# Altium PCB I2C_module_v1.PcbDoc (part 3 of 4)
Units mil, origin at the board's own origin, x right, y up, seen from the top; angles counter-clockwise.
Board outline 3300 x 2890 mil, 2 copper layers (Top Layer, Bottom Layer); 41 components, 28 nets, 177 pads, 28 vias.
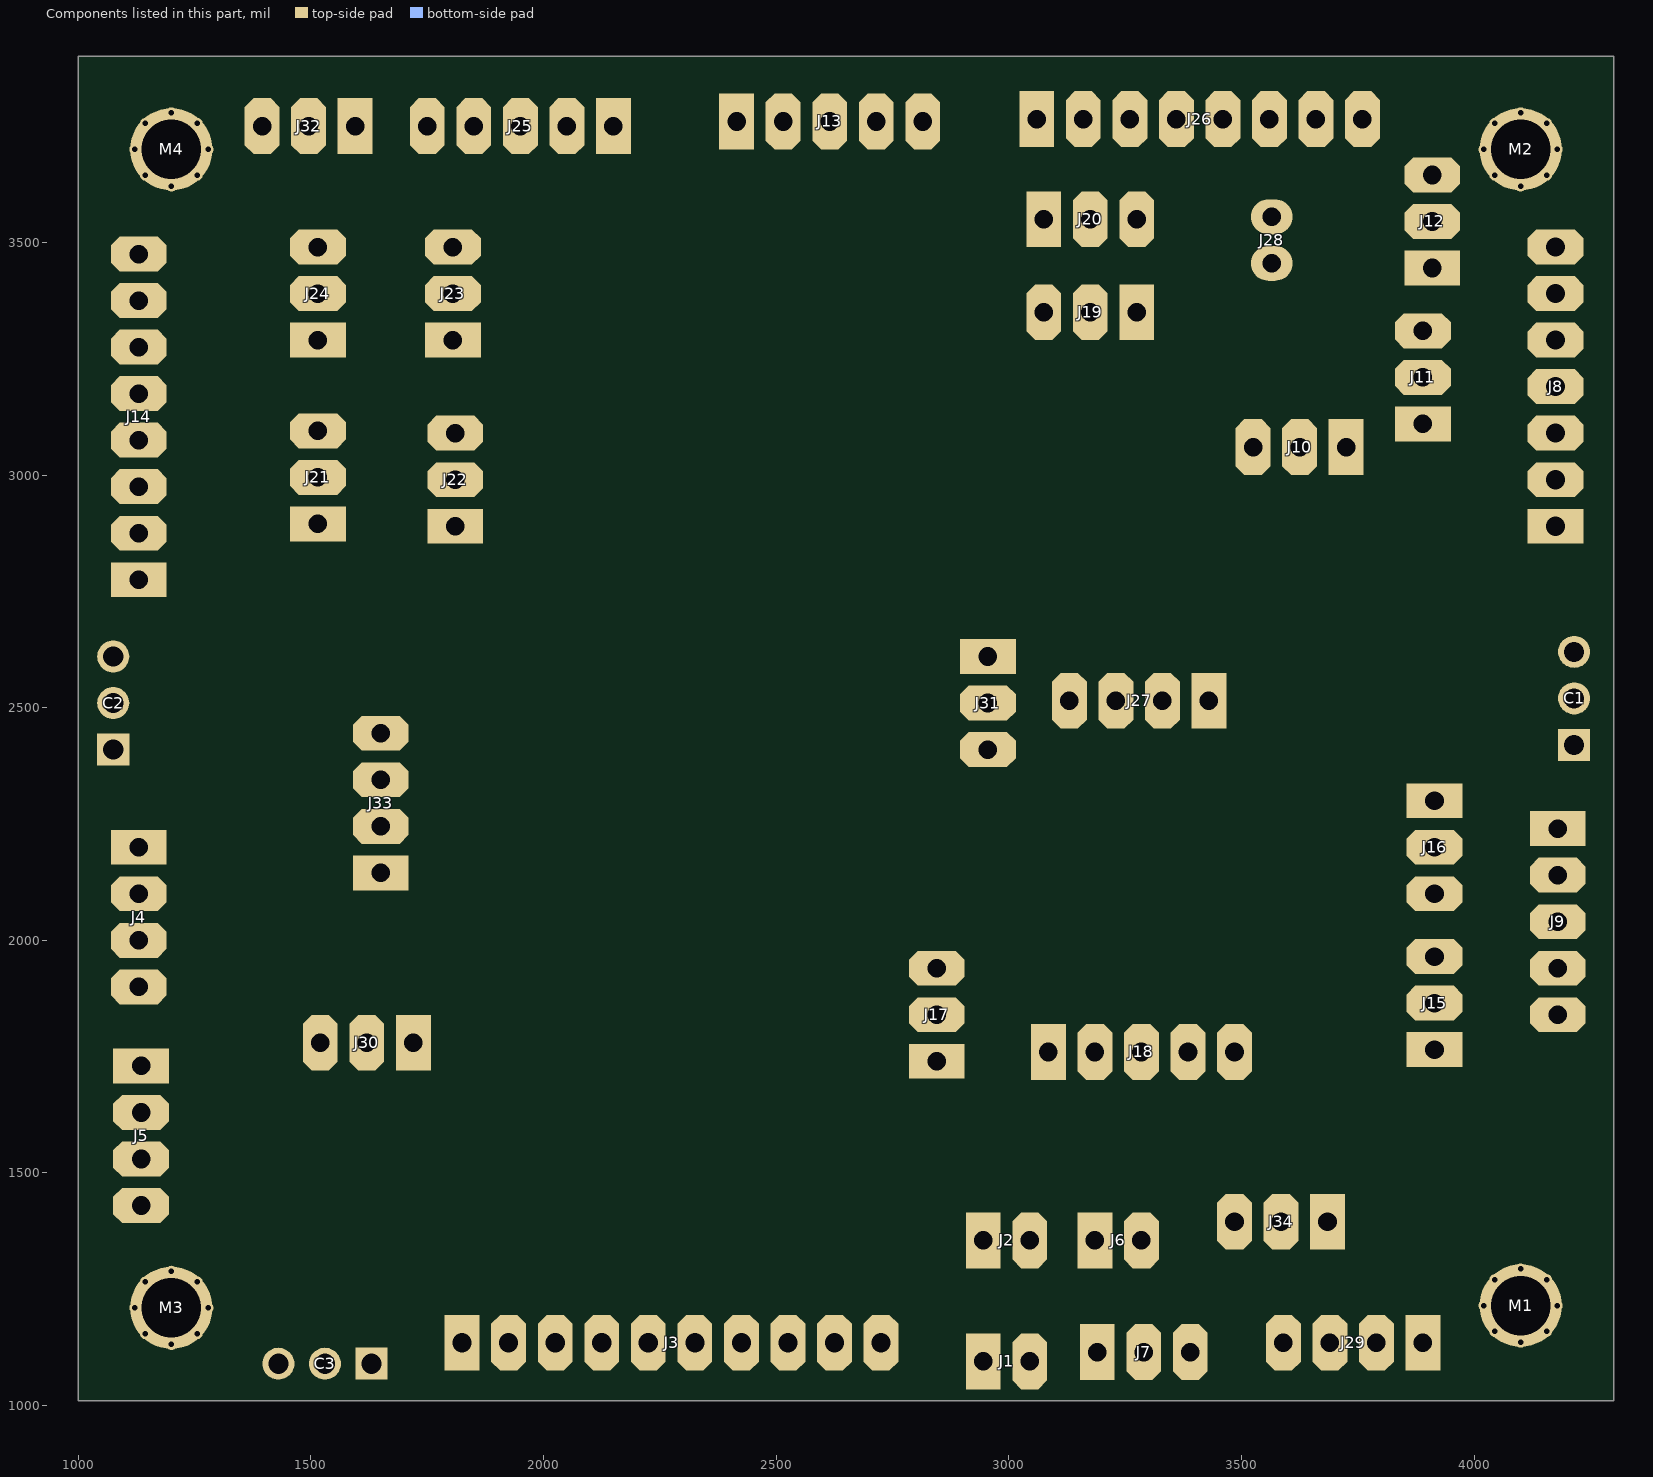
[diagram p3: the components of this part, seen from the top]

## Via types
v1: diameter 50, hole 28, Top Layer to Bottom Layer, 28 vias

## Nets (pads, with @x,y where several pads share a name; then routed paths per layer and width w, separated by ;. In a path a pad name is that pad's centre, name@x,y a point inside that pad or via, vN(x,y) a via of type N, cw(c..) or ccw(c..) an arc to the next point about the centre after c; other vN are vias at no path point) (continued)
copper on no net: (continued)
  Top Layer w0.3: 1963.5,2169.8 1967.1,2169.8 ; 1963.5,2177.6 1967.1,2177.6 ; 1963.5,2190.5 1967.4,2190.5 ; 1963.5,2198.3 1967.1,2198.3 ; 1963.5,2419.1 1968.3,2419.1 ; 1963.8,2159.3 1966.8,2159.3 ; 1963.8,2167.4 1966.8,2167.4 ; 1963.8,2180 1966.8,2180 ; 1963.8,2188.1 1966.8,2188.1 ; 1963.8,2311.4 2011.8,2311.4 ; 1963.8,2419.4 1968.6,2419.4 ; 1963.8,2419.7 1968.6,2419.7 ; 1964.1,2157.2 1966.5,2157.2 ; 1964.1,2190.2 1966.5,2190.2 ; 1964.1,2282.6 2036.7,2282.6 ; 1964.1,2420 1968.9,2420 ; 1964.4,2169.5 1966.2,2169.5 ; 1964.4,2177.9 1966.2,2177.9 ; 1964.4,2198.6 1966.2,2198.6 ; 1964.4,2420.3 1969.2,2420.3 ; 1964.7,2420.6 1969.5,2420.6 ; 1965,2140.7 1969.2,2140.7 ; 1965,2311.7 2012.4,2311.7 ; 1965,2420.9 1969.8,2420.9 ; 1965,2421.2 1970.1,2421.2 ; 1965.3,2421.5 1970.4,2421.5 ; 1965.6,2421.8 1970.7,2421.8 ; 1965.9,2422.1 1971,2422.1 ; 1966.2,2140.4 1969.2,2140.4 ; 1966.2,2312 2013.3,2312 ; 1966.2,2422.4 1971.3,2422.4 ; 1966.2,2422.7 1971.6,2422.7 ; 1966.5,2129 1968,2129 ; 1966.5,2140.1 1969.2,2140.1 ; 1966.5,2423 1971.9,2423 ; 1966.8,2423.3 1972.2,2423.3 ; 1967.1,2129.3 1968.3,2129.3 ; 1967.1,2139.8 1969.2,2139.8 ; 1967.1,2312.3 2013.9,2312.3 ; 1967.1,2423.6 1972.5,2423.6 ; 1967.4,2129.6 1968.6,2129.6 ; 1967.4,2139.5 1969.2,2139.5 ; 1967.4,2282.9 2038.2,2282.9 ; 1967.4,2423.9 1972.8,2423.9 ; 1967.7,2129.9 1968.9,2129.9 ; 1967.7,2138.9 1969.2,2138.9 ; 1967.7,2139.2 1969.2,2139.2 ; 1967.7,2424.2 1973.1,2424.2 ; 1967.7,2424.5 1973.4,2424.5 ; 1968,2130.2 1969.2,2130.2 ; 1968,2138.6 1969.2,2138.6 ; 1968,2141 1969.2,2141 ; 1968,2424.8 1973.7,2424.8 ; 1968.3,2130.5 1969.5,2130.5 ; 1968.3,2138 1969.2,2138 ; 1968.3,2138.3 1969.2,2138.3 ; 1968.3,2141.3 1969.2,2141.3 ; 1968.3,2141.6 1968.9,2141.6 ; 1968.3,2312.6 2014.5,2312.6 ; 1968.3,2425.1 1974,2425.1 ; 1968.6,2130.8 1969.5,2130.8 ; 1968.6,2137.1 1969.2,2137.1 ; 1968.6,2137.4 1969.2,2137.4 ; 1968.6,2137.7 1969.2,2137.7 ; 1968.6,2425.4 1974.3,2425.4 ; 1968.9,2131.1 1969.5,2131.1 ; 1968.9,2131.4 1969.2,2131.4 ; 1968.9,2425.7 1974.6,2425.7 ; 1969.2,2312.9 2015.1,2312.9 ; 1969.2,2426 1974.9,2426 ; 1969.5,2426.3 1975.2,2426.3 ; 1969.5,2426.6 1975.5,2426.6 ; 1969.8,2426.9 1975.8,2426.9 ; 1970.1,2313.2 2015.7,2313.2 ; 1970.1,2427.2 1976.1,2427.2 ; 1970.4,2283.2 2039.7,2283.2 ; 1970.4,2427.5 1976.4,2427.5 ; 1970.7,2427.8 1976.7,2427.8 ; 1971,2428.1 1977.3,2428.1 ; 1971.3,2172.8 1979.7,2172.8 ; 1971.3,2173.1 1980,2173.1 ; 1971.3,2173.4 1980,2173.4 ; 1971.3,2173.7 1980,2173.7 ; 1971.3,2174 1980,2174 ; 1971.3,2174.3 1980,2174.3 ; 1971.3,2174.6 1979.7,2174.6 ; 1971.3,2193.5 1979.7,2193.5 ; 1971.3,2193.8 1980,2193.8 ; 1971.3,2194.1 1980,2194.1 ; 1971.3,2194.4 1980,2194.4 ; 1971.3,2194.7 1980,2194.7 ; 1971.3,2195 1980,2195 ; 1971.3,2195.3 1979.7,2195.3 ; 1971.3,2313.5 2016.3,2313.5 ; 1971.3,2428.4 1977.6,2428.4 ; 1971.6,2171.9 1979.7,2171.9 ; 1971.6,2172.2 1979.7,2172.2 ; 1971.6,2172.5 1979.7,2172.5 ; 1971.6,2174.9 1979.7,2174.9 ; 1971.6,2175.2 1979.7,2175.2 ; 1971.6,2175.5 1979.7,2175.5 ; 1971.6,2192.6 1979.7,2192.6 ; 1971.6,2192.9 1979.7,2192.9 ; 1971.6,2193.2 1979.7,2193.2 ; 1971.6,2195.6 1979.7,2195.6 ; 1971.6,2195.9 1979.7,2195.9 ; 1971.6,2196.2 1979.7,2196.2 ; 1971.6,2428.7 1977.9,2428.7 ; 1971.9,2171.3 1979.1,2171.3 ; 1971.9,2171.6 1979.4,2171.6 ; 1971.9,2175.8 1979.4,2175.8 ; 1971.9,2176.1 1979.1,2176.1 ; 1971.9,2192 1979.4,2192 ; 1971.9,2192.3 1979.4,2192.3 ; 1971.9,2196.5 1979.4,2196.5 ; 1971.9,2196.8 1979.1,2196.8 ; 1971.9,2429 1978.2,2429 ; 1971.9,2429.3 1978.5,2429.3 ; 1972.2,2171 1979.1,2171 ; 1972.2,2176.4 1979.1,2176.4 ; 1972.2,2191.7 1979.1,2191.7 ; 1972.2,2197.1 1979.1,2197.1 ; 1972.2,2313.8 2016.9,2313.8 ; 1972.2,2429.6 1978.8,2429.6 ; 1972.5,2170.7 1978.8,2170.7 ; 1972.5,2176.7 1978.8,2176.7 ; 1972.5,2191.4 1978.8,2191.4 ; 1972.5,2197.4 1978.8,2197.4 ; 1972.5,2429.9 1979.1,2429.9 ; 1972.8,2170.4 1978.5,2170.4 ; 1972.8,2177 1978.5,2177 ; 1972.8,2191.1 1978.5,2191.1 ; 1972.8,2197.7 1978.5,2197.7 ; 1972.8,2430.2 1979.7,2430.2 ; 1973.1,2170.1 1978.2,2170.1 ; 1973.1,2177.3 1978.2,2177.3 ; 1973.1,2190.8 1978.2,2190.8 ; 1973.1,2198 1977.9,2198 ; 1973.1,2283.5 2040.9,2283.5 ; 1973.1,2314.1 2017.5,2314.1 ; 1973.1,2430.5 1980,2430.5 ; 1973.4,2430.8 1980.3,2430.8 ; 1973.7,2169.8 1977.6,2169.8 ; 1973.7,2177.6 1977.6,2177.6 ; 1973.7,2190.5 1977.6,2190.5 ; 1973.7,2198.3 1977.6,2198.3 ; 1973.7,2431.1 1980.6,2431.1 ; 1974,2314.4 2018.1,2314.4 ; 1974,2431.4 1980.9,2431.4 ; 1974.3,2431.7 1981.5,2431.7 ; 1974.6,2169.5 1976.7,2169.5 ; 1974.6,2177.9 1976.7,2177.9 ; 1974.6,2190.2 1976.7,2190.2 ; 1974.6,2198.6 1976.4,2198.6 ; 1974.6,2432 1981.8,2432 ; 1974.9,2314.7 2018.4,2314.7 ; 1974.9,2432.3 1982.1,2432.3 ; 1975.2,2432.6 1982.4,2432.6 ; 1975.5,2283.8 2042.4,2283.8 ; 1975.5,2432.9 1983,2432.9 ; 1975.8,2315 2019,2315 ; 1975.8,2433.2 1983.3,2433.2 ; 1976.1,2433.5 1983.6,2433.5 ; 1976.4,2433.8 1983.9,2433.8 ; 1976.7,2315.3 2019.6,2315.3 ; 1976.7,2434.1 1984.5,2434.1 ; 1977,2434.4 1984.8,2434.4 ; 1977.3,2434.7 1985.1,2434.7 ; 1977.6,2315.6 2020.2,2315.6 ; 1977.6,2435 1985.7,2435 ; 1977.9,2284.1 2043.6,2284.1 ; 1977.9,2435.3 1986,2435.3 ; 1978.2,2435.6 1986.3,2435.6 ; 1978.5,2315.9 2020.5,2315.9 ; 1978.5,2435.9 1986.9,2435.9 ; 1978.8,2138.3 1979.4,2138.3 ; 1978.8,2138.6 1979.4,2138.6 ; 1978.8,2138.9 1979.4,2138.9 ; 1978.8,2139.2 1979.7,2139.2 ; 1978.8,2139.5 1979.7,2139.5 ; 1978.8,2139.8 1980,2139.8 ; 1978.8,2140.1 1980.6,2140.1 ; 1978.8,2140.4 1989.9,2140.4 ; 1978.8,2140.7 1989.9,2140.7 ; 1978.8,2141 1989.9,2141 ; 1978.8,2141.3 1989.9,2141.3 ; 1978.8,2436.2 1987.2,2436.2 ; 1979.1,2316.2 2021.1,2316.2 ; 1979.1,2436.5 1987.5,2436.5 ; 1979.4,2436.8 1988.1,2436.8 ; 1979.7,2437.1 1988.4,2437.1 ; 1980,2316.5 2021.7,2316.5 ; 1980,2437.4 1989,2437.4 ; 1980.3,2284.4 2044.8,2284.4 ; 1980.3,2437.7 1989.3,2437.7 ; 1980.6,2438 1989.9,2438 ; 1980.9,2316.8 2022,2316.8 ; 1981.2,2438.3 1990.2,2438.3 ; 1981.5,2173.4 1990.2,2173.4 ; 1981.5,2173.7 1990.2,2173.7 ; 1981.5,2174 1990.2,2174 ; 1981.5,2193.8 1990.2,2193.8 ; 1981.5,2194.1 1990.2,2194.1 ; 1981.5,2194.4 1990.2,2194.4 ; 1981.5,2194.7 1990.2,2194.7 ; 1981.5,2317.1 2022.6,2317.1 ; 1981.5,2438.6 1990.5,2438.6 ; 1981.8,2172.2 1989.9,2172.2 ; 1981.8,2172.5 1989.9,2172.5 ; 1981.8,2172.8 1990.2,2172.8 ; 1981.8,2173.1 1990.2,2173.1 ; 1981.8,2174.3 1990.2,2174.3 ; 1981.8,2174.6 1990.2,2174.6 ; 1981.8,2174.9 1989.9,2174.9 ; 1981.8,2175.2 1989.9,2175.2 ; 1981.8,2192.9 1989.9,2192.9 ; 1981.8,2193.2 1989.9,2193.2 ; 1981.8,2193.5 1990.2,2193.5 ; 1981.8,2195 1990.2,2195 ; 1981.8,2195.3 1990.2,2195.3 ; 1981.8,2195.6 1989.9,2195.6 ; 1981.8,2195.9 1989.9,2195.9 ; 1981.8,2438.9 1991.1,2438.9 ; 1982.1,2171.6 1989.6,2171.6 ; 1982.1,2171.9 1989.9,2171.9 ; 1982.1,2175.5 1989.9,2175.5 ; 1982.1,2175.8 1989.6,2175.8 ; 1982.1,2192.3 1989.6,2192.3 ; 1982.1,2192.6 1989.9,2192.6 ; 1982.1,2196.2 1989.9,2196.2 ; 1982.1,2196.5 1989.6,2196.5 ; 1982.1,2439.2 1991.4,2439.2 ; 1982.4,2171 1989.3,2171 ; 1982.4,2171.3 1989.6,2171.3 ; 1982.4,2176.1 1989.6,2176.1 ; 1982.4,2176.4 1989.3,2176.4 ; 1982.4,2191.7 1989.3,2191.7 ; 1982.4,2192 1989.6,2192 ; 1982.4,2196.8 1989.6,2196.8 ; 1982.4,2197.1 1989.3,2197.1 ; 1982.4,2284.7 2046,2284.7 ; 1982.4,2317.4 2023.2,2317.4 ; 1982.4,2439.5 1992,2439.5 ; 1982.7,2170.7 1989,2170.7 ; 1982.7,2176.7 1989,2176.7 ; 1982.7,2191.4 1989,2191.4 ; 1982.7,2197.4 1989,2197.4 ; 1982.7,2439.8 1992.3,2439.8 ; 1983,2129 1985.4,2129 ; 1983,2129.3 1985.4,2129.3 ; 1983,2129.6 1985.4,2129.6 ; 1983,2170.4 1988.7,2170.4 ; 1983,2177 1988.7,2177 ; 1983,2191.1 1988.7,2191.1 ; 1983,2197.7 1988.7,2197.7 ; 1983,2317.7 2023.5,2317.7 ; 1983,2440.1 1992.9,2440.1 ; 1983.3,2129.9 1985.4,2129.9 ; 1983.3,2130.2 1985.4,2130.2 ; 1983.3,2130.5 1985.4,2130.5 ; 1983.3,2130.8 1985.4,2130.8 ; 1983.3,2131.1 1985.4,2131.1 ; 1983.3,2131.4 1985.4,2131.4 ; 1983.3,2131.7 1985.4,2131.7 ; 1983.3,2132 1985.4,2132 ; 1983.3,2132.3 1985.4,2132.3 ; 1983.3,2132.6 1985.4,2132.6 ; 1983.3,2132.9 1985.4,2132.9 ; 1983.3,2133.2 1985.4,2133.2 ; 1983.3,2133.5 1985.4,2133.5 ; 1983.3,2133.8 1985.4,2133.8 ; 1983.3,2134.1 1985.4,2134.1 ; 1983.3,2134.4 1985.4,2134.4 ; 1983.3,2134.7 1985.4,2134.7 ; 1983.3,2135 1985.4,2135 ; 1983.3,2135.3 1985.4,2135.3 ; 1983.3,2135.6 1985.4,2135.6 ; 1983.3,2135.9 1985.4,2135.9 ; 1983.3,2136.2 1985.4,2136.2 ; 1983.3,2136.5 1985.4,2136.5 ; 1983.3,2136.8 1985.4,2136.8 ; 1983.3,2137.1 1985.4,2137.1 ; 1983.3,2137.4 1985.4,2137.4 ; 1983.3,2137.7 1985.4,2137.7 ; 1983.3,2138 1985.4,2138 ; 1983.3,2138.3 1985.4,2138.3 ; 1983.3,2138.6 1985.4,2138.6 ; 1983.3,2138.9 1985.4,2138.9 ; 1983.3,2139.2 1985.4,2139.2 ; 1983.3,2139.5 1985.4,2139.5 ; 1983.3,2139.8 1985.4,2139.8 ; 1983.3,2140.1 1985.4,2140.1 ; 1983.3,2190.8 1988.4,2190.8 ; 1983.3,2440.4 1993.5,2440.4 ; 1983.6,2170.1 1988.4,2170.1 ; 1983.6,2177.3 1988.4,2177.3 ; 1983.6,2198 1988.4,2198 ; 1983.9,2169.8 1987.8,2169.8 ; 1983.9,2177.6 1987.8,2177.6 ; 1983.9,2190.5 1987.8,2190.5 ; 1983.9,2198.3 1987.8,2198.3 ; 1983.9,2318 2024.1,2318 ; 1983.9,2440.7 1993.8,2440.7 ; 1984.2,2285 2047.2,2285 ; 1984.2,2441 1994.4,2441 ; 1984.5,2318.3 2024.4,2318.3 ; 1984.5,2357.3 1989.6,2357.3 ; 1984.5,2441.3 1994.7,2441.3 ; 1984.8,2169.5 1986.9,2169.5 ; 1984.8,2177.9 1986.9,2177.9 ; 1984.8,2190.2 1986.9,2190.2 ; 1984.8,2357 1992.6,2357 ; 1984.8,2441.6 1995.3,2441.6 ; 1985.1,2198.6 1986.9,2198.6 ; 1985.1,2318.6 2024.7,2318.6 ; 1985.1,2441.9 1995.9,2441.9 ; 1985.4,2356.7 1994.7,2356.7 ; 1985.4,2442.2 1996.2,2442.2 ; 1986,2318.9 2025.3,2318.9 ; 1986,2356.4 1996.5,2356.4 ; 1986,2442.5 1996.8,2442.5 ; 1986.3,2285.3 2048.4,2285.3 ; 1986.3,2442.8 1997.4,2442.8 ; 1986.6,2319.2 2025.6,2319.2 ; 1986.6,2443.1 1997.7,2443.1 ; 1986.9,2356.1 1998.3,2356.1 ; 1986.9,2443.4 1998.3,2443.4 ; 1987.2,2319.5 2025.9,2319.5 ; 1987.5,2355.8 1999.8,2355.8 ; 1987.5,2443.7 1998.9,2443.7 ; 1987.8,2319.8 2026.5,2319.8 ; 1987.8,2444 1999.5,2444 ; 1988.1,2140.1 1989.9,2140.1 ; 1988.1,2285.6 2049.6,2285.6 ; 1988.1,2355.5 2001.3,2355.5 ; 1988.1,2444.3 1999.8,2444.3 ; 1988.4,2139.8 1989.9,2139.8 ; 1988.4,2320.1 2026.8,2320.1 ; 1988.4,2444.6 2000.4,2444.6 ; 1988.7,2139.5 1989.9,2139.5 ; 1989,2138.9 1989.9,2138.9 ; 1989,2139.2 1989.9,2139.2 ; 1989,2320.4 2027.1,2320.4 ; 1989,2355.2 2002.5,2355.2 ; 1989,2444.9 2001,2444.9 ; 1989.3,2138.3 1989.9,2138.3 ; 1989.3,2138.6 1989.9,2138.6 ; 1989.3,2445.2 2001.6,2445.2 ; 1989.6,2320.7 2027.7,2320.7 ; 1989.6,2354.9 2004,2354.9 ; 1989.6,2445.5 2002.2,2445.5 ; 1989.9,2285.9 2050.8,2285.9 ; 1990.2,2321 2028,2321 ; 1990.2,2354.6 2005.2,2354.6 ; 1990.2,2445.8 2002.8,2445.8 ; 1990.5,2446.1 2003.4,2446.1 ; 1990.8,2321.3 2028.3,2321.3 ; 1990.8,2354.3 2006.1,2354.3 ; 1990.8,2446.4 2004,2446.4 ; 1991.1,2446.7 2004.6,2446.7 ; 1991.4,2321.6 2028.6,2321.6 ; 1991.4,2354 2007.3,2354 ; 1991.7,2286.2 2052,2286.2 ; 1991.7,2447 2005.2,2447 ; 1992,2169.5 2013.6,2169.5 ; 1992,2169.8 2013.3,2169.8 ; 1992,2170.1 2013,2170.1 ; 1992,2170.4 2012.7,2170.4 ; 1992,2170.7 2012.4,2170.7 ; 1992,2171 2012.1,2171 ; 1992,2171.3 2011.8,2171.3 ; 1992,2171.6 2011.2,2171.6 ; 1992,2171.9 2010.9,2171.9 ; 1992,2172.2 2010.6,2172.2 ; 1992,2172.5 2010,2172.5 ; 1992,2172.8 2010.3,2172.8 ; 1992,2173.1 2010.9,2173.1 ; 1992,2173.4 2011.8,2173.4 ; 1992,2173.7 2012.4,2173.7 ; 1992,2174 2013,2174 ; 1992,2174.3 2013.6,2174.3 ; 1992,2174.6 2013.9,2174.6 ; 1992,2174.9 2014.5,2174.9 ; 1992,2175.2 2015.1,2175.2 ; 1992,2175.5 2015.4,2175.5 ; 1992,2175.8 2015.7,2175.8 ; 1992,2176.1 2016.3,2176.1 ; 1992,2176.4 2016.6,2176.4 ; 1992,2176.7 2016.9,2176.7 ; 1992,2177 2017.5,2177 ; 1992,2177.3 2017.8,2177.3 ; 1992,2177.6 2018.1,2177.6 ; 1992,2177.9 2018.4,2177.9 ; 1992,2190.2 2018.1,2190.2 ; 1992,2190.5 2017.8,2190.5 ; 1992,2190.8 2017.5,2190.8 ; 1992,2191.1 2017.2,2191.1 ; 1992,2191.4 2016.9,2191.4 ; 1992,2191.7 2016.6,2191.7 ; 1992,2192 2016,2192 ; 1992,2192.3 2015.7,2192.3 ; 1992,2192.6 2015.4,2192.6 ; 1992,2192.9 2014.8,2192.9 ; 1992,2193.2 2014.2,2193.2 ; 1992,2193.5 2013.9,2193.5 ; 1992,2193.8 2013.3,2193.8 ; 1992,2194.1 2012.7,2194.1 ; 1992,2194.4 2012.1,2194.4 ; 1992,2194.7 2011.5,2194.7 ; 1992,2195 2010.9,2195 ; 1992,2195.3 2010,2195.3 ; 1992,2195.6 2009.4,2195.6 ; 1992,2195.9 2008.5,2195.9 ; 1992,2196.2 2007.6,2196.2 ; 1992,2196.5 2006.7,2196.5 ; 1992,2196.8 2005.5,2196.8 ; 1992,2197.1 2004.3,2197.1 ; 1992,2197.4 2003.1,2197.4 ; 1992,2197.7 2001.6,2197.7 ; 1992,2198 1999.8,2198 ; 1992,2198.3 1997.7,2198.3 ; 1992,2198.6 1993.8,2198.6 ; 1992,2321.9 2028.9,2321.9 ; 1992,2447.3 2005.8,2447.3 ; 1992.3,2353.7 2008.5,2353.7 ; 1992.6,2322.2 2029.2,2322.2 ; 1992.6,2447.6 2006.4,2447.6 ; 1992.9,2353.4 2009.4,2353.4 ; 1992.9,2447.9 2007,2447.9 ; 1993.2,2286.5 2052.9,2286.5 ; 1993.2,2322.5 2029.5,2322.5 ; 1993.2,2448.2 2007.6,2448.2 ; 1993.5,2322.8 2029.8,2322.8 ; 1993.5,2353.1 2010.6,2353.1 ; 1993.8,2448.5 2008.2,2448.5 ; 1994.1,2323.1 2030.1,2323.1 ; 1994.1,2352.8 2011.5,2352.8 ; 1994.1,2448.8 2008.8,2448.8 ; 1994.4,2169.2 2013.9,2169.2 ; 1994.7,2323.4 2030.4,2323.4 ; 1994.7,2352.5 2012.4,2352.5 ; 1994.7,2449.1 2009.7,2449.1 ; 1995,2286.8 2054.1,2286.8 ; 1995,2323.7 2030.7,2323.7 ; 1995,2449.4 2010.3,2449.4 ; 1995.3,2352.2 2013.3,2352.2 ; 1995.3,2449.7 2010.9,2449.7 ; 1995.6,2324 2031,2324 ; 1995.9,2351.9 2014.2,2351.9 ; 1995.9,2450 2011.5,2450 ; 1996.2,2189.9 2018.4,2189.9 ; 1996.2,2324.3 2031.3,2324.3 ; 1996.2,2450.3 2012.4,2450.3 ; 1996.5,2168.9 2014.2,2168.9 ; 1996.5,2178.2 2018.7,2178.2 ; 1996.5,2287.1 2055,2287.1 ; 1996.5,2324.6 2031.6,2324.6 ; 1996.5,2351.6 2015.1,2351.6 ; 1996.8,2450.6 2013,2450.6 ; 1997.1,2324.9 2031.9,2324.9 ; 1997.1,2351.3 2016,2351.3 ; 1997.1,2450.9 2013.9,2450.9 ; 1997.4,2325.2 2032.2,2325.2 ; 1997.7,2168.6 2014.5,2168.6 ; 1997.7,2351 2016.9,2351 ; 1997.7,2451.2 2014.5,2451.2 ; 1998,2287.4 2055.9,2287.4 ; 1998,2325.5 2032.5,2325.5 ; 1998.3,2325.8 2032.8,2325.8 ; 1998.3,2350.7 2017.5,2350.7 ; 1998.3,2451.5 2015.4,2451.5 ; 1998.6,2141 2007,2141 ; 1998.6,2141.3 2005.8,2141.3 ; 1998.6,2451.8 2016,2451.8 ; 1998.9,2168.3 2014.8,2168.3 ; 1998.9,2326.1 2032.8,2326.1 ; 1998.9,2350.4 2018.4,2350.4 ; 1999.2,2189.6 2018.7,2189.6 ; 1999.2,2326.4 2033.1,2326.4 ; 1999.2,2350.1 2019,2350.1 ; 1999.2,2452.1 2016.9,2452.1 ; 1999.5,2140.7 2007.6,2140.7 ; 1999.5,2287.7 2057.1,2287.7 ; 1999.5,2326.7 2033.4,2326.7 ; 1999.5,2452.4 2017.5,2452.4 ; 1999.8,2168 2015.1,2168 ; 1999.8,2178.5 2018.7,2178.5 ; 1999.8,2349.8 2019.9,2349.8 ; 2000.1,2129 2002.8,2129 ; 2000.1,2140.4 2007.9,2140.4 ; 2000.1,2327 2033.7,2327 ; 2000.1,2452.7 2018.4,2452.7 ; 2000.4,2129.3 2002.8,2129.3 ; 2000.4,2129.6 2002.5,2129.6 ; 2000.4,2129.9 2002.5,2129.9 ; 2000.4,2130.2 2002.5,2130.2 ; 2000.4,2130.5 2002.5,2130.5 ; 2000.4,2130.8 2002.5,2130.8 ; 2000.4,2131.1 2002.5,2131.1 ; 2000.4,2131.4 2002.5,2131.4 ; 2000.4,2131.7 2002.5,2131.7 ; 2000.4,2132 2002.5,2132 ; 2000.4,2132.3 2002.5,2132.3 ; 2000.4,2132.6 2002.5,2132.6 ; 2000.4,2132.9 2002.5,2132.9 ; 2000.4,2133.2 2002.5,2133.2 ; 2000.4,2133.5 2002.5,2133.5 ; 2000.4,2133.8 2002.5,2133.8 ; 2000.4,2134.1 2006.1,2134.1 ; 2000.4,2134.4 2006.4,2134.4 ; 2000.4,2134.7 2007,2134.7 ; 2000.4,2135 2002.5,2135 ; 2000.4,2135.3 2002.5,2135.3 ; 2000.4,2135.6 2002.5,2135.6 ; 2000.4,2135.9 2002.5,2135.9 ; 2000.4,2136.2 2002.5,2136.2 ; 2000.4,2136.5 2002.5,2136.5 ; 2000.4,2136.8 2002.5,2136.8 ; 2000.4,2137.1 2002.5,2137.1 ; 2000.4,2137.4 2002.5,2137.4 ; 2000.4,2137.7 2002.5,2137.7 ; 2000.4,2138 2002.5,2138 ; 2000.4,2138.3 2002.5,2138.3 ; 2000.4,2138.6 2002.5,2138.6 ; 2000.4,2138.9 2002.5,2138.9 ; 2000.4,2139.2 2002.5,2139.2 ; 2000.4,2139.5 2002.5,2139.5 ; 2000.4,2139.8 2002.5,2139.8 ; 2000.4,2140.1 2002.5,2140.1 ; 2000.4,2167.7 2015.4,2167.7 ; 2000.4,2327.3 2033.7,2327.3 ; 2000.4,2349.5 2020.5,2349.5 ; 2000.4,2453 2019.3,2453 ; 2000.7,2327.6 2034,2327.6 ; 2000.7,2349.2 2021.4,2349.2 ; 2001,2288 2058,2288 ; 2001,2327.9 2034.3,2327.9 ; 2001,2453.3 2020.2,2453.3 ; 2001.3,2167.4 2015.7,2167.4 ; 2001.3,2189.3 2019,2189.3 ; 2001.3,2348.9 2022,2348.9 ; 2001.6,2328.2 2034.3,2328.2 ; 2001.6,2348.6 2022.6,2348.6 ; 2001.6,2453.6 2021.1,2453.6 ; 2001.9,2167.1 2016,2167.1 ; 2001.9,2178.8 2019,2178.8 ; 2001.9,2328.5 2034.6,2328.5 ; 2001.9,2453.9 2022,2453.9 ; 2002.2,2288.3 2058.9,2288.3 ; 2002.2,2328.8 2034.6,2328.8 ; 2002.2,2348.3 2023.2,2348.3 ; 2002.5,2166.8 2016,2166.8 ; 2002.5,2329.1 2034.9,2329.1 ; 2002.5,2348 2023.8,2348 ; 2002.5,2454.2 2022.9,2454.2 ; 2002.8,2329.4 2034.9,2329.4 ; 2002.8,2347.7 2024.4,2347.7 ; 2003.1,2166.5 2016.3,2166.5 ; 2003.1,2189 2019.3,2189 ; 2003.1,2329.7 2035.2,2329.7 ; 2003.1,2454.5 2023.8,2454.5 ; 2003.4,2179.1 2019.3,2179.1 ; 2003.4,2330 2035.2,2330 ; 2003.4,2347.4 2025,2347.4 ; 2003.7,2133.8 2006.4,2133.8 ; 2003.7,2135 2007.6,2135 ; 2003.7,2166.2 2016.6,2166.2 ; 2003.7,2288.6 2059.8,2288.6 ; 2003.7,2330.3 2035.2,2330.3 ; 2003.7,2347.1 2025.6,2347.1 ; 2003.7,2454.8 2024.7,2454.8 ; 2004,2133.5 2006.7,2133.5 ; 2004,2165.9 2016.9,2165.9 ; 2004,2330.6 2035.5,2330.6 ; 2004,2346.8 2026.2,2346.8 ; 2004,2455.1 2025.9,2455.1 ; 2004.3,2133.2 2006.7,2133.2 ; 2004.3,2188.7 2019.3,2188.7 ; 2004.3,2330.9 2035.5,2330.9 ; 2004.3,2346.5 2026.8,2346.5 ; 2004.6,2132.6 2007.3,2132.6 ; 2004.6,2132.9 2007,2132.9 ; 2004.6,2165.6 2016.9,2165.6 ; 2004.6,2331.2 2035.5,2331.2 ; 2004.6,2346.2 2027.1,2346.2 ; 2004.6,2455.4 2026.8,2455.4 ; 2004.9,2132.3 2007.6,2132.3 ; 2004.9,2135.3 2008.2,2135.3 ; 2004.9,2179.4 2019.6,2179.4 ; 2004.9,2288.9 2060.7,2288.9 ; 2004.9,2331.5 2035.8,2331.5 ; 2004.9,2345.9 2027.7,2345.9 ; 2005.2,2131.7 2007.9,2131.7 ; 2005.2,2132 2007.6,2132 ; 2005.2,2140.1 2008.2,2140.1 ; 2005.2,2165.3 2017.2,2165.3 ; 2005.2,2331.8 2035.8,2331.8 ; 2005.2,2345.6 2028,2345.6 ; 2005.2,2455.7 2028,2455.7 ; 2005.5,2131.4 2008.2,2131.4 ; 2005.5,2135.6 2008.2,2135.6 ; 2005.5,2139.8 2008.5,2139.8 ; 2005.5,2165 2017.5,2165 ; 2005.5,2188.4 2019.6,2188.4 ; 2005.5,2332.1 2035.8,2332.1 ; 2005.5,2345.3 2028.6,2345.3 ; 2005.8,2131.1 2008.2,2131.1 ; 2005.8,2135.9 2008.5,2135.9 ; 2005.8,2164.7 2017.5,2164.7 ; 2005.8,2179.7 2019.6,2179.7 ; 2005.8,2332.4 2035.8,2332.4 ; 2005.8,2345 2028.9,2345 ; 2005.8,2456 2028.9,2456 ; 2006.1,2130.5 2008.8,2130.5 ; 2006.1,2130.8 2008.5,2130.8 ; 2006.1,2136.2 2008.8,2136.2 ; 2006.1,2139.2 2008.8,2139.2 ; 2006.1,2139.5 2008.8,2139.5 ; 2006.1,2332.7 2035.8,2332.7 ; 2006.1,2333 2036.1,2333 ; 2006.1,2344.7 2029.5,2344.7 ; 2006.1,2456.3 2030.1,2456.3 ; 2006.4,2130.2 2009.1,2130.2 ; 2006.4,2136.5 2008.8,2136.5 ; 2006.4,2136.8 2009.1,2136.8 ; 2006.4,2137.1 2009.1,2137.1 ; 2006.4,2138.6 2009.1,2138.6 ; 2006.4,2138.9 2009.1,2138.9 ; 2006.4,2164.4 2017.8,2164.4 ; 2006.4,2289.2 2061.6,2289.2 ; 2006.4,2333.3 2036.1,2333.3 ; 2006.4,2344.4 2029.8,2344.4 ; 2006.7,2129.6 2009.4,2129.6 ; 2006.7,2129.9 2009.1,2129.9 ; 2006.7,2137.4 2009.1,2137.4 ; 2006.7,2137.7 2009.1,2137.7 ; 2006.7,2138 2009.1,2138 ; 2006.7,2138.3 2009.1,2138.3 ; 2006.7,2164.1 2018.1,2164.1 ; 2006.7,2188.1 2019.9,2188.1 ; 2006.7,2333.6 2036.1,2333.6 ; 2006.7,2333.9 2036.1,2333.9 ; 2006.7,2343.8 2030.7,2343.8 ; 2006.7,2344.1 2030.1,2344.1 ; 2006.7,2456.6 2031.3,2456.6 ; 2007,2129.3 2009.7,2129.3 ; 2007,2163.8 2018.1,2163.8 ; 2007,2180 2019.9,2180 ; 2007,2334.2 2036.1,2334.2 ; 2007,2343.5 2031,2343.5 ; 2007.3,2129 2010.3,2129 ; 2007.3,2163.5 2018.4,2163.5 ; 2007.3,2334.5 2036.1,2334.5 ; 2007.3,2334.8 2036.1,2334.8 ; 2007.3,2342.9 2031.6,2342.9 ; 2007.3,2343.2 2031.3,2343.2 ; 2007.3,2456.9 2032.8,2456.9 ; 2007.6,2163.2 2018.4,2163.2 ; 2007.6,2187.8 2019.9,2187.8 ; 2007.6,2289.5 2062.5,2289.5 ; 2007.6,2335.1 2035.8,2335.1 ; 2007.6,2335.4 2035.8,2335.4 ; 2007.6,2342.3 2032.2,2342.3 ; 2007.6,2342.6 2031.9,2342.6 ; 2007.9,2162.9 2018.7,2162.9 ; 2007.9,2180.3 2020.2,2180.3 ; 2007.9,2335.7 2035.8,2335.7 ; 2007.9,2336 2035.8,2336 ; 2007.9,2336.3 2035.8,2336.3 ; 2007.9,2341.7 2032.8,2341.7 ; 2007.9,2342 2032.5,2342 ; 2007.9,2457.2 2034,2457.2 ; 2008.2,2162.6 2018.7,2162.6 ; 2008.2,2187.5 2020.2,2187.5 ; 2008.2,2336.6 2035.5,2336.6 ; 2008.2,2336.9 2035.5,2336.9 ; 2008.2,2337.2 2035.5,2337.2 ; 2008.2,2340.8 2033.4,2340.8 ; 2008.2,2341.1 2033.1,2341.1 ; 2008.2,2341.4 2032.8,2341.4 ; 2008.5,2162.3 2019,2162.3 ; 2008.5,2180.6 2020.2,2180.6 ; 2008.5,2337.5 2035.2,2337.5 ; 2008.5,2337.8 2035.2,2337.8 ; 2008.5,2338.1 2035.2,2338.1 ; 2008.5,2338.4 2034.9,2338.4 ; 2008.5,2338.7 2034.9,2338.7 ; 2008.5,2339 2034.6,2339 ; 2008.5,2339.3 2034.3,2339.3 ; 2008.5,2339.6 2034.3,2339.6 ; 2008.5,2339.9 2034,2339.9 ; 2008.5,2340.2 2033.7,2340.2 ; 2008.5,2340.5 2033.7,2340.5 ; 2008.5,2457.5 2035.5,2457.5 ; 2008.8,2162 2019,2162 ; 2008.8,2289.8 2063.1,2289.8 ; 2009.1,2161.7 2019.3,2161.7 ; 2009.1,2187.2 2020.2,2187.2 ; 2009.1,2457.8 2037,2457.8 ; 2009.4,2161.4 2019.3,2161.4 ; 2009.4,2180.9 2020.2,2180.9 ; 2009.7,2160.8 2019.6,2160.8 ; 2009.7,2161.1 2019.6,2161.1 ; 2009.7,2181.2 2020.5,2181.2 ; 2009.7,2186.9 2020.5,2186.9 ; 2009.7,2458.1 2038.5,2458.1 ; 2010,2160.5 2019.6,2160.5 ; 2010,2290.1 2064,2290.1 ; 2010.3,2159.9 2019.9,2159.9 ; 2010.3,2160.2 2019.9,2160.2 ; 2010.3,2181.5 2020.5,2181.5 ; 2010.3,2186.6 2020.5,2186.6 ; 2010.3,2458.4 2040.3,2458.4 ; 2010.6,2159.3 2020.2,2159.3 ; 2010.6,2159.6 2019.9,2159.6 ; 2010.6,2186.3 2020.5,2186.3 ; 2010.9,2158.7 2020.2,2158.7 ; 2010.9,2159 2020.2,2159 ; 2010.9,2181.8 2020.8,2181.8 ; 2010.9,2458.7 2042.1,2458.7 ; 2011.2,2158.1 2020.5,2158.1 ; 2011.2,2158.4 2020.2,2158.4 ; 2011.2,2182.1 2020.8,2182.1 ; 2011.2,2186 2020.8,2186 ; 2011.2,2290.4 2064.9,2290.4 ; 2011.5,2157.5 2020.5,2157.5 ; 2011.5,2157.8 2020.5,2157.8 ; 2011.5,2182.4 2020.8,2182.4 ; 2011.5,2185.7 2020.8,2185.7 ; 2011.5,2459 2044.2,2459 ; 2011.8,2156.6 2020.8,2156.6 ; 2011.8,2156.9 2020.5,2156.9 ; 2011.8,2157.2 2020.5,2157.2 ; 2011.8,2182.7 2020.8,2182.7 ; 2011.8,2185.4 2020.8,2185.4 ; 2012.1,2155.1 2020.8,2155.1 ; 2012.1,2155.4 2020.8,2155.4 ; 2012.1,2155.7 2020.8,2155.7 ; 2012.1,2156 2020.8,2156 ; 2012.1,2156.3 2020.8,2156.3 ; 2012.1,2183 2020.8,2183 ; 2012.1,2183.3 2020.8,2183.3 ; 2012.1,2184.8 2020.8,2184.8 ; 2012.1,2185.1 2020.8,2185.1 ; 2012.1,2270.3 2037.6,2270.3 ; 2012.1,2459.3 2046.9,2459.3 ; 2012.4,2148.8 2020.8,2148.8 ; 2012.4,2149.1 2020.8,2149.1 ; 2012.4,2149.4 2020.8,2149.4 ; 2012.4,2149.7 2020.8,2149.7 ; 2012.4,2150 2020.8,2150 ; 2012.4,2150.3 2020.8,2150.3 ; 2012.4,2150.6 2020.8,2150.6 ; 2012.4,2150.9 2020.8,2150.9 ; 2012.4,2151.2 2020.8,2151.2 ; 2012.4,2151.5 2020.8,2151.5 ; 2012.4,2151.8 2020.8,2151.8 ; 2012.4,2152.1 2020.8,2152.1 ; 2012.4,2152.4 2020.8,2152.4 ; 2012.4,2152.7 2020.8,2152.7 ; 2012.4,2153 2020.8,2153 ; 2012.4,2153.3 2020.8,2153.3 ; 2012.4,2153.6 2020.8,2153.6 ; 2012.4,2153.9 2020.8,2153.9 ; 2012.4,2154.2 2020.8,2154.2 ; 2012.4,2154.5 2020.8,2154.5 ; 2012.4,2154.8 2020.8,2154.8 ; 2012.4,2183.6 2020.8,2183.6 ; 2012.4,2183.9 2020.8,2183.9 ; 2012.4,2184.2 2020.8,2184.2 ; 2012.4,2184.5 2020.8,2184.5 ; 2012.4,2290.7 2065.5,2290.7 ; 2012.7,2459.6 2050.2,2459.6 ; 2013.3,2459.9 2109.3,2459.9 ; 2013.6,2270.6 2040.3,2270.6 ; 2013.6,2291 2066.4,2291 ; 2013.9,2270 2034.6,2270 ; 2013.9,2460.2 2109,2460.2 ; 2014.8,2291.3 2067,2291.3 ; 2014.8,2460.5 2108.4,2460.5 ; 2015.4,2460.8 2107.8,2460.8 ; 2016,2291.6 2067.9,2291.6 ; 2016,2461.1 2107.2,2461.1 ; 2016.3,2270.9 2042.4,2270.9 ; 2016.6,2461.4 2106.6,2461.4 ; 2017.2,2291.9 2068.5,2291.9 ; 2017.5,2461.7 2106,2461.7 ; 2018.1,2292.2 2069.4,2292.2 ; 2018.1,2462 2105.4,2462 ; 2018.7,2269.7 2030.1,2269.7 ; 2019,2462.3 2104.8,2462.3 ; 2019.3,2271.2 2044.2,2271.2 ; 2019.3,2292.5 2070,2292.5 ; 2019.6,2462.6 2104.2,2462.6 ; 2020.2,2132.9 2022.9,2132.9 ; 2020.2,2133.2 2022.9,2133.2 ; 2020.2,2133.5 2022.6,2133.5 ; 2020.2,2133.8 2022.6,2133.8 ; 2020.2,2134.1 2022.6,2134.1 ; 2020.2,2134.4 2022.6,2134.4 ; 2020.2,2134.7 2022.6,2134.7 ; 2020.2,2135 2022.6,2135 ; 2020.2,2135.3 2022.6,2135.3 ; 2020.2,2135.6 2022.6,2135.6 ; 2020.2,2135.9 2022.6,2135.9 ; 2020.2,2136.2 2022.9,2136.2 ; 2020.2,2136.5 2022.9,2136.5 ; 2020.2,2292.8 2070.6,2292.8 ; 2020.5,2131.7 2023.2,2131.7 ; 2020.5,2132 2022.9,2132 ; 2020.5,2132.3 2022.9,2132.3 ; 2020.5,2132.6 2022.9,2132.6 ; 2020.5,2136.8 2022.9,2136.8 ; 2020.5,2137.1 2022.9,2137.1 ; 2020.5,2137.4 2022.9,2137.4 ; 2020.5,2462.9 2103.3,2462.9 ; 2020.8,2131.1 2023.2,2131.1 ; 2020.8,2131.4 2023.2,2131.4 ; 2020.8,2137.7 2023.2,2137.7 ; 2020.8,2138 2023.2,2138 ; 2021.1,2130.5 2023.5,2130.5 ; 2021.1,2130.8 2023.5,2130.8 ; 2021.1,2138.3 2023.2,2138.3 ; 2021.1,2138.6 2023.5,2138.6 ; 2021.1,2293.1 2071.2,2293.1 ; 2021.1,2463.2 2102.7,2463.2 ; 2021.4,2130.2 2023.8,2130.2 ; 2021.4,2138.9 2023.8,2138.9 ; 2021.7,2129.9 2024.1,2129.9 ; 2021.7,2139.2 2023.8,2139.2 ; 2021.7,2271.5 2046,2271.5 ; 2022,2129.6 2024.1,2129.6 ; 2022,2139.5 2024.1,2139.5 ; 2022,2139.8 2024.4,2139.8 ; 2022,2463.5 2102.1,2463.5 ; 2022.3,2129.3 2024.7,2129.3 ; 2022.3,2140.1 2024.7,2140.1 ; 2022.3,2293.4 2071.8,2293.4 ; 2022.6,2129 2025,2129 ; 2022.9,2140.4 2025.3,2140.4 ; 2022.9,2463.8 2101.2,2463.8 ; 2023.2,2140.7 2026.5,2140.7 ; 2023.2,2293.7 2072.4,2293.7 ; 2023.5,2464.1 2100.6,2464.1 ; 2023.8,2141 2029.8,2141 ; 2024.1,2271.8 2047.8,2271.8 ; 2024.1,2294 2073,2294 ; 2024.4,2141.3 2029.2,2141.3 ; 2024.4,2464.4 2099.7,2464.4 ; 2024.7,2152.1 2033.1,2152.1 ; 2024.7,2152.4 2033.4,2152.4 ; 2024.7,2152.7 2033.4,2152.7 ; 2024.7,2153 2033.4,2153 ; 2024.7,2153.3 2033.4,2153.3 ; 2024.7,2153.6 2033.4,2153.6 ; 2024.7,2153.9 2033.1,2153.9 ; 2024.7,2193.5 2033.1,2193.5 ; 2024.7,2193.8 2033.4,2193.8 ; 2024.7,2194.1 2033.4,2194.1 ; 2024.7,2194.4 2033.4,2194.4 ; 2024.7,2194.7 2033.4,2194.7 ; 2024.7,2195 2033.4,2195 ; 2024.7,2195.3 2033.1,2195.3 ; 2025,2151.2 2032.8,2151.2 ; 2025,2151.5 2033.1,2151.5 ; 2025,2151.8 2033.1,2151.8 ; 2025,2154.2 2033.1,2154.2 ; 2025,2154.5 2033.1,2154.5 ; 2025,2154.8 2033.1,2154.8 ; 2025,2192.6 2033.1,2192.6 ; 2025,2192.9 2033.1,2192.9 ; 2025,2193.2 2033.1,2193.2 ; 2025,2195.6 2033.1,2195.6 ; 2025,2195.9 2033.1,2195.9 ; 2025,2196.2 2033.1,2196.2 ; 2025,2294.3 2073.6,2294.3 ; 2025.3,2141.6 2028.3,2141.6 ; 2025.3,2150.9 2032.8,2150.9 ; 2025.3,2155.1 2032.8,2155.1 ; 2025.3,2155.4 2032.8,2155.4 ; 2025.3,2192 2032.8,2192 ; 2025.3,2192.3 2032.8,2192.3 ; 2025.3,2196.5 2032.8,2196.5 ; 2025.3,2196.8 2032.5,2196.8 ; 2025.3,2464.7 2099.1,2464.7 ; 2025.6,2150.3 2032.2,2150.3 ; 2025.6,2150.6 2032.5,2150.6 ; 2025.6,2155.7 2032.5,2155.7 ; 2025.6,2191.7 2032.5,2191.7 ; 2025.6,2197.1 2032.5,2197.1 ; 2025.9,2150 2032.2,2150 ; 2025.9,2156 2032.2,2156 ; 2025.9,2191.4 2032.2,2191.4 ; 2025.9,2197.4 2032.2,2197.4 ; 2025.9,2294.6 2074.2,2294.6 ; 2026.2,2149.7 2031.6,2149.7 ; 2026.2,2156.3 2031.9,2156.3 ; 2026.2,2191.1 2031.9,2191.1 ; 2026.2,2197.7 2031.9,2197.7 ; 2026.2,2465 2098.2,2465 ; 2026.5,2156.6 2031.6,2156.6 ; 2026.5,2190.8 2031.6,2190.8 ; 2026.5,2198 2031.3,2198 ; 2026.5,2272.1 2049.3,2272.1 ; 2026.8,2149.4 2031.3,2149.4 ; 2026.8,2156.9 2031,2156.9 ; 2026.8,2294.9 2074.8,2294.9 ; 2027.1,2140.7 2030.4,2140.7 ; 2027.1,2190.5 2031,2190.5 ; 2027.1,2198.3 2031,2198.3 ; 2027.1,2465.3 2097.6,2465.3 ; 2027.4,2149.1 2030.7,2149.1 ; 2027.7,2157.2 2030.4,2157.2 ; 2027.7,2295.2 2075.4,2295.2 ; 2028,2190.2 2030.1,2190.2 ; 2028,2198.6 2029.8,2198.6 ; 2028,2465.6 2096.7,2465.6 ; 2028.3,2140.4 2030.7,2140.4 ; 2028.6,2129 2031,2129 ; 2028.6,2272.4 2050.5,2272.4 ; 2028.6,2295.5 2076,2295.5 ; 2028.9,2129.3 2031.3,2129.3 ; 2028.9,2140.1 2031,2140.1 ; 2028.9,2465.9 2095.8,2465.9 ; 2029.2,2129.6 2031.6,2129.6 ; 2029.2,2139.8 2031.3,2139.8 ; 2029.5,2129.9 2031.9,2129.9 ; 2029.5,2139.5 2031.6,2139.5 ; 2029.5,2295.8 2076.3,2295.8 ; 2029.8,2130.2 2031.9,2130.2 ; 2029.8,2138.9 2032.2,2138.9 ; 2029.8,2139.2 2031.9,2139.2 ; 2029.8,2466.2 2094.9,2466.2 ; 2030.1,2130.5 2032.2,2130.5 ; 2030.1,2130.8 2032.5,2130.8 ; 2030.1,2131.1 2032.5,2131.1 ; 2030.1,2138.3 2032.5,2138.3 ; 2030.1,2138.6 2032.2,2138.6 ; 2030.1,2296.1 2076.9,2296.1 ; 2030.4,2131.4 2032.8,2131.4 ; 2030.4,2131.7 2032.8,2131.7 ; 2030.4,2132 2032.8,2132 ; 2030.4,2137.4 2032.8,2137.4 ; 2030.4,2137.7 2032.8,2137.7 ; 2030.4,2138 2032.5,2138 ; 2030.7,2132.3 2033.1,2132.3 ; 2030.7,2132.6 2033.1,2132.6 ; 2030.7,2132.9 2033.1,2132.9 ; 2030.7,2133.2 2033.1,2133.2 ; 2030.7,2133.5 2033.4,2133.5 ; 2030.7,2133.8 2033.4,2133.8 ; 2030.7,2134.1 2033.4,2134.1 ; 2030.7,2134.4 2033.4,2134.4 ; 2030.7,2134.7 2033.4,2134.7 ; 2030.7,2135 2033.4,2135 ; 2030.7,2135.3 2033.4,2135.3 ; 2030.7,2135.6 2033.4,2135.6 ; 2030.7,2135.9 2033.4,2135.9 ; 2030.7,2136.2 2033.1,2136.2 ; 2030.7,2136.5 2033.1,2136.5 ; 2030.7,2136.8 2033.1,2136.8 ; 2030.7,2137.1 2033.1,2137.1 ; 2030.7,2272.7 2052,2272.7 ; 2030.7,2466.5 2094,2466.5 ; 2031,2296.4 2077.5,2296.4 ; 2031.9,2296.7 2077.8,2296.7 ; 2031.9,2466.8 2093.1,2466.8 ; 2032.5,2273 2053.2,2273 ; 2032.5,2297 2078.4,2297 ; 2032.8,2467.1 2091.9,2467.1 ; 2033.4,2297.3 2078.7,2297.3 ; 2034,2357.9 2034.3,2357.9 ; 2034,2358.2 2034.6,2358.2 ; 2034,2467.4 2091,2467.4 ; 2034.3,2297.6 2079.3,2297.6 ; 2034.3,2358.5 2034.9,2358.5 ; 2034.6,2273.3 2054.4,2273.3 ; 2034.6,2358.8 2035.5,2358.8 ; 2034.9,2297.9 2079.6,2297.9 ; 2035.2,2149.1 2051.7,2149.1 ; 2035.2,2149.4 2051.7,2149.4 ; 2035.2,2149.7 2051.7,2149.7 ; 2035.2,2150 2051.7,2150 ; 2035.2,2150.3 2051.7,2150.3 ; 2035.2,2150.6 2051.7,2150.6 ; 2035.2,2150.9 2051.7,2150.9 ; 2035.2,2151.2 2051.7,2151.2 ; 2035.2,2151.5 2051.7,2151.5 ; 2035.2,2151.8 2051.7,2151.8 ; 2035.2,2152.1 2051.7,2152.1 ; 2035.2,2152.4 2051.7,2152.4 ; 2035.2,2152.7 2051.7,2152.7 ; 2035.2,2153 2051.7,2153 ; 2035.2,2153.3 2051.7,2153.3 ; 2035.2,2153.6 2051.7,2153.6 ; 2035.2,2153.9 2051.7,2153.9 ; 2035.2,2154.2 2051.7,2154.2 ; 2035.2,2154.5 2051.7,2154.5 ; 2035.2,2154.8 2051.7,2154.8 ; 2035.2,2155.1 2051.7,2155.1 ; 2035.2,2155.4 2051.7,2155.4 ; 2035.2,2155.7 2051.7,2155.7 ; 2035.2,2156 2051.7,2156 ; 2035.2,2156.3 2051.7,2156.3 ; 2035.2,2156.6 2051.7,2156.6 ; 2035.2,2156.9 2051.7,2156.9 ; 2035.2,2157.2 2051.7,2157.2 ; 2035.2,2157.5 2043.6,2157.5 ; 2035.2,2157.8 2043.6,2157.8 ; 2035.2,2158.1 2043.6,2158.1 ; 2035.2,2158.4 2043.6,2158.4 ; 2035.2,2158.7 2043.6,2158.7 ; 2035.2,2159 2043.6,2159 ; 2035.2,2159.3 2043.6,2159.3 ; 2035.2,2159.6 2043.6,2159.6 ; 2035.2,2159.9 2043.6,2159.9 ; 2035.2,2160.2 2043.6,2160.2 ; 2035.2,2160.5 2043.6,2160.5 ; 2035.2,2160.8 2043.6,2160.8 ; 2035.2,2161.1 2043.6,2161.1 ; 2035.2,2161.4 2043.6,2161.4 ; 2035.2,2161.7 2043.6,2161.7 ; 2035.2,2162 2043.6,2162 ; 2035.2,2162.3 2043.6,2162.3 ; 2035.2,2162.6 2043.6,2162.6 ; 2035.2,2162.9 2043.6,2162.9 ; 2035.2,2163.2 2043.6,2163.2 ; 2035.2,2163.5 2043.6,2163.5 ; 2035.2,2163.8 2043.6,2163.8 ; 2035.2,2164.1 2043.6,2164.1 ; 2035.2,2164.4 2043.6,2164.4 ; 2035.2,2164.7 2043.6,2164.7 ; 2035.2,2165 2043.6,2165 ; 2035.2,2165.3 2043.6,2165.3 ; 2035.2,2165.6 2043.6,2165.6 ; 2035.2,2165.9 2043.6,2165.9 ; 2035.2,2166.2 2043.6,2166.2 ; 2035.2,2166.5 2043.6,2166.5 ; 2035.2,2166.8 2043.6,2166.8 ; 2035.2,2167.1 2043.6,2167.1 ; 2035.2,2167.4 2043.6,2167.4 ; 2035.2,2167.7 2043.6,2167.7 ; 2035.2,2168 2043.6,2168 ; 2035.2,2168.3 2043.6,2168.3 ; 2035.2,2168.6 2043.6,2168.6 ; 2035.2,2168.9 2043.6,2168.9 ; 2035.2,2169.2 2043.6,2169.2 ; 2035.2,2169.5 2043.6,2169.5 ; 2035.2,2169.8 2043.6,2169.8 ; 2035.2,2170.1 2043.6,2170.1 ; 2035.2,2170.4 2043.6,2170.4 ; 2035.2,2170.7 2043.6,2170.7 ; 2035.2,2171 2043.6,2171 ; 2035.2,2171.3 2043.6,2171.3 ; 2035.2,2171.6 2043.6,2171.6 ; 2035.2,2171.9 2043.6,2171.9 ; 2035.2,2172.2 2043.6,2172.2 ; 2035.2,2172.5 2043.6,2172.5 ; 2035.2,2172.8 2043.6,2172.8 ; 2035.2,2173.1 2043.6,2173.1 ; 2035.2,2173.4 2043.6,2173.4 ; 2035.2,2173.7 2043.6,2173.7 ; 2035.2,2174 2043.6,2174 ; 2035.2,2174.3 2043.6,2174.3 ; 2035.2,2174.6 2043.6,2174.6 ; 2035.2,2174.9 2043.6,2174.9 ; 2035.2,2175.2 2043.6,2175.2 ; 2035.2,2175.5 2043.6,2175.5 ; 2035.2,2175.8 2043.6,2175.8 ; 2035.2,2176.1 2043.6,2176.1 ; 2035.2,2176.4 2043.6,2176.4 ; 2035.2,2176.7 2043.6,2176.7 ; 2035.2,2177 2043.6,2177 ; 2035.2,2177.3 2043.6,2177.3 ; 2035.2,2177.6 2043.6,2177.6 ; 2035.2,2177.9 2043.6,2177.9 ; 2035.2,2178.2 2043.6,2178.2 ; 2035.2,2178.5 2043.6,2178.5 ; 2035.2,2178.8 2043.6,2178.8 ; 2035.2,2179.1 2043.6,2179.1 ; 2035.2,2179.4 2043.6,2179.4 ; 2035.2,2179.7 2043.6,2179.7 ; 2035.2,2180 2043.6,2180 ; 2035.2,2180.3 2043.6,2180.3 ; 2035.2,2180.6 2043.6,2180.6 ; 2035.2,2180.9 2043.6,2180.9 ; 2035.2,2181.2 2043.6,2181.2 ; 2035.2,2181.5 2043.6,2181.5 ; 2035.2,2181.8 2043.6,2181.8 ; 2035.2,2182.1 2043.6,2182.1 ; 2035.2,2182.4 2043.6,2182.4 ; 2035.2,2182.7 2043.6,2182.7 ; 2035.2,2183 2043.6,2183 ; 2035.2,2183.3 2043.6,2183.3 ; 2035.2,2183.6 2043.6,2183.6 ; 2035.2,2183.9 2043.6,2183.9 ; 2035.2,2184.2 2043.6,2184.2 ; 2035.2,2184.5 2043.6,2184.5 ; 2035.2,2184.8 2043.6,2184.8 ; 2035.2,2185.1 2043.6,2185.1 ; 2035.2,2185.4 2043.6,2185.4 ; 2035.2,2185.7 2043.6,2185.7 ; 2035.2,2186 2043.6,2186 ; 2035.2,2186.3 2043.6,2186.3 ; 2035.2,2186.6 2043.6,2186.6 ; 2035.2,2186.9 2043.6,2186.9 ; 2035.2,2187.2 2043.6,2187.2 ; 2035.2,2187.5 2043.6,2187.5 ; 2035.2,2187.8 2043.6,2187.8 ; 2035.2,2188.1 2043.6,2188.1 ; 2035.2,2188.4 2043.6,2188.4 ; 2035.2,2188.7 2043.6,2188.7 ; 2035.2,2189 2043.6,2189 ; 2035.2,2189.3 2043.6,2189.3 ; 2035.2,2189.6 2043.6,2189.6 ; 2035.2,2189.9 2043.6,2189.9 ; 2035.2,2190.2 2051.7,2190.2 ; 2035.2,2190.5 2051.7,2190.5 ; 2035.2,2190.8 2051.7,2190.8 ; 2035.2,2191.1 2051.7,2191.1 ; 2035.2,2191.4 2051.7,2191.4 ; 2035.2,2191.7 2051.7,2191.7 ; 2035.2,2192 2051.7,2192 ; 2035.2,2192.3 2051.7,2192.3 ; 2035.2,2192.6 2051.7,2192.6 ; 2035.2,2192.9 2051.7,2192.9 ; 2035.2,2193.2 2051.7,2193.2 ; 2035.2,2193.5 2051.7,2193.5 ; 2035.2,2193.8 2051.7,2193.8 ; 2035.2,2194.1 2051.7,2194.1 ; 2035.2,2194.4 2051.7,2194.4 ; 2035.2,2194.7 2051.7,2194.7 ; 2035.2,2195 2051.7,2195 ; 2035.2,2195.3 2051.7,2195.3 ; 2035.2,2195.6 2051.7,2195.6 ; 2035.2,2195.9 2051.7,2195.9 ; 2035.2,2196.2 2051.7,2196.2 ; 2035.2,2196.5 2051.7,2196.5 ; 2035.2,2196.8 2051.7,2196.8 ; 2035.2,2197.1 2051.7,2197.1 ; 2035.2,2197.4 2051.7,2197.4 ; 2035.2,2197.7 2051.7,2197.7 ; 2035.2,2198 2051.7,2198 ; 2035.2,2198.3 2051.7,2198.3 ; 2035.2,2198.6 2051.7,2198.6 ; 2035.2,2359.1 2035.8,2359.1 ; 2035.2,2467.7 2089.8,2467.7 ; 2035.5,2359.4 2036.1,2359.4 ; 2035.8,2298.2 2080.2,2298.2 ; 2035.8,2359.7 2036.4,2359.7 ; 2036.1,2273.6 2055.6,2273.6 ; 2036.1,2360 2037,2360 ; 2036.4,2298.5 2080.5,2298.5 ; 2036.4,2360.3 2037.3,2360.3 ; 2036.4,2468 2088.9,2468 ; 2036.7,2360.6 2037.6,2360.6 ; 2037,2360.9 2037.9,2360.9 ; 2037.3,2298.8 2080.8,2298.8 ; 2037.6,2361.2 2038.2,2361.2 ; 2037.6,2468.3 2087.7,2468.3 ; 2037.9,2273.9 2056.8,2273.9 ; 2037.9,2299.1 2081.4,2299.1 ; 2037.9,2361.5 2038.8,2361.5 ; 2038.2,2361.8 2039.1,2361.8 ; 2038.5,2299.4 2081.7,2299.4 ; 2038.5,2362.1 2039.4,2362.1 ; 2038.8,2362.4 2039.7,2362.4 ; 2038.8,2468.6 2086.5,2468.6 ; 2039.1,2362.7 2040.3,2362.7 ; 2039.4,2274.2 2057.7,2274.2 ; 2039.4,2299.7 2082,2299.7 ; 2039.4,2363 2040.6,2363 ; 2040,2300 2082.3,2300 ; 2040,2363.3 2040.9,2363.3 ; 2040,2468.9 2085,2468.9 ; 2040.3,2363.6 2041.2,2363.6 ; 2040.6,2300.3 2082.9,2300.3 ; 2040.6,2363.9 2041.5,2363.9 ; 2040.9,2274.5 2058.9,2274.5 ; 2040.9,2364.2 2042.1,2364.2 ; 2041.2,2364.5 2042.4,2364.5 ; 2041.5,2141 2045.7,2141 ; 2041.5,2141.3 2045.4,2141.3 ; 2041.5,2300.6 2083.2,2300.6 ; 2041.5,2364.8 2042.7,2364.8 ; 2041.5,2469.2 2083.5,2469.2 ; 2041.8,2365.1 2043,2365.1 ; 2042.1,2140.7 2046,2140.7 ; 2042.1,2300.9 2083.5,2300.9 ; 2042.1,2365.4 2043.6,2365.4 ; 2042.4,2274.8 2059.8,2274.8 ; 2042.7,2301.2 2083.8,2301.2 ; 2042.7,2365.7 2043.9,2365.7 ; 2042.7,2469.5 2082,2469.5 ; 2043,2140.4 2046.3,2140.4 ; 2043,2337.8 2047.8,2337.8 ; 2043,2366 2044.2,2366 ; 2043.3,2140.1 2046.6,2140.1 ; 2043.3,2301.5 2084.1,2301.5 ; 2043.3,2337.5 2052.3,2337.5 ; 2043.3,2366.3 2044.5,2366.3 ; 2043.6,2275.1 2061,2275.1 ; 2043.6,2337.2 2055.3,2337.2 ; 2043.6,2366.6 2045.1,2366.6 ; 2043.9,2129 2045.4,2129 ; 2043.9,2139.8 2046.6,2139.8 ; 2043.9,2301.8 2084.4,2301.8 ; 2043.9,2336.9 2058,2336.9 ; 2043.9,2366.9 2045.4,2366.9 ; 2044.2,2129.3 2045.4,2129.3 ; 2044.2,2129.6 2045.4,2129.6 ; 2044.2,2129.9 2045.4,2129.9 ; 2044.2,2130.2 2045.4,2130.2 ; 2044.2,2130.5 2045.4,2130.5 ; 2044.2,2130.8 2045.4,2130.8 ; 2044.2,2131.1 2045.4,2131.1 ; 2044.2,2131.4 2045.4,2131.4 ; 2044.2,2131.7 2045.4,2131.7 ; 2044.2,2132 2045.4,2132 ; 2044.2,2132.3 2045.4,2132.3 ; 2044.2,2132.6 2045.4,2132.6 ; 2044.2,2132.9 2045.4,2132.9 ; 2044.2,2133.2 2045.4,2133.2 ; 2044.2,2133.5 2045.4,2133.5 ; 2044.2,2133.8 2045.4,2133.8 ; 2044.2,2134.1 2045.4,2134.1 ; 2044.2,2134.4 2045.4,2134.4 ; 2044.2,2134.7 2045.4,2134.7 ; 2044.2,2135 2045.4,2135 ; 2044.2,2135.3 2045.4,2135.3 ; 2044.2,2135.6 2045.4,2135.6 ; 2044.2,2135.9 2045.4,2135.9 ; 2044.2,2136.2 2045.4,2136.2 ; 2044.2,2136.5 2045.4,2136.5 ; 2044.2,2136.8 2045.4,2136.8 ; 2044.2,2137.1 2045.4,2137.1 ; 2044.2,2137.4 2045.4,2137.4 ; 2044.2,2137.7 2048.4,2137.7 ; 2044.2,2138 2048.1,2138 ; 2044.2,2138.3 2047.8,2138.3 ; 2044.2,2138.6 2047.8,2138.6 ; 2044.2,2138.9 2047.5,2138.9 ; 2044.2,2139.2 2047.2,2139.2 ; 2044.2,2139.5 2046.9,2139.5 ; 2044.2,2367.2 2045.7,2367.2 ; 2044.5,2302.1 2084.7,2302.1 ; 2044.5,2336.6 2060.1,2336.6 ; 2044.5,2367.5 2046,2367.5 ; 2044.5,2469.8 2080.5,2469.8 ; 2045.1,2275.4 2061.9,2275.4 ; 2045.1,2302.4 2085,2302.4 ; 2045.1,2336.3 2061.9,2336.3 ; 2045.1,2367.8 2046.3,2367.8 ; 2045.4,2368.1 2046.9,2368.1 ; 2045.7,2137.4 2048.7,2137.4 ; 2045.7,2302.7 2085.3,2302.7 ; 2045.7,2336 2063.7,2336 ; 2045.7,2368.4 2047.2,2368.4 ; 2046,2137.1 2049,2137.1 ; 2046,2368.7 2047.5,2368.7 ; 2046.3,2136.8 2049,2136.8 ; 2046.3,2275.7 2062.8,2275.7 ; 2046.3,2303 2085.6,2303 ; 2046.3,2335.7 2065.2,2335.7 ; 2046.3,2369 2047.8,2369 ; 2046.3,2470.1 2078.7,2470.1 ; 2046.6,2136.2 2049.6,2136.2 ; 2046.6,2136.5 2049.3,2136.5 ; 2046.6,2369.3 2048.4,2369.3 ; 2046.9,2135.9 2049.9,2135.9 ; 2046.9,2303.3 2085.6,2303.3 ; 2046.9,2335.4 2066.7,2335.4 ; 2046.9,2369.6 2048.7,2369.6 ; 2047.2,2135.6 2050.2,2135.6 ; 2047.5,2135.3 2050.2,2135.3 ; 2047.5,2276 2063.7,2276 ; 2047.5,2303.6 2085.9,2303.6 ; 2047.5,2335.1 2067.9,2335.1 ; 2047.5,2369.9 2049,2369.9 ; 2047.8,2134.7 2050.8,2134.7 ; 2047.8,2135 2050.5,2135 ; 2047.8,2370.2 2049.3,2370.2 ; 2048.1,2134.4 2051.1,2134.4 ; 2048.1,2303.9 2086.2,2303.9 ; 2048.1,2370.5 2049.6,2370.5 ; 2048.1,2470.4 2076.6,2470.4 ; 2048.4,2134.1 2051.4,2134.1 ; 2048.4,2334.8 2069.1,2334.8 ; 2048.4,2370.8 2050.2,2370.8 ; 2048.7,2133.8 2051.4,2133.8 ; 2048.7,2276.3 2064.6,2276.3 ; 2048.7,2304.2 2086.5,2304.2 ; 2048.7,2371.1 2050.5,2371.1 ; 2049,2133.2 2052,2133.2 ; 2049,2133.5 2051.7,2133.5 ; 2049,2304.5 2086.8,2304.5 ; 2049,2334.5 2070.3,2334.5 ; 2049,2371.4 2050.8,2371.4 ; 2049.3,2132.9 2052.3,2132.9 ; 2049.3,2371.7 2051.1,2371.7 ; 2049.6,2132.6 2052.6,2132.6 ; 2049.6,2276.6 2065.5,2276.6 ; 2049.6,2304.8 2086.8,2304.8 ; 2049.9,2132.3 2052.6,2132.3 ; 2049.9,2334.2 2071.2,2334.2 ; 2049.9,2372 2051.7,2372 ; 2050.2,2132 2052.9,2132 ; 2050.2,2305.1 2087.1,2305.1 ; 2050.2,2372.3 2052,2372.3 ; 2050.5,2131.4 2054.4,2131.4 ; 2050.5,2131.7 2054.4,2131.7 ; 2050.5,2333.9 2072.4,2333.9 ; 2050.5,2372.6 2052.3,2372.6 ; 2050.5,2470.7 2074.2,2470.7 ; 2050.8,2131.1 2054.4,2131.1 ; 2050.8,2276.9 2066.1,2276.9 ; 2050.8,2305.4 2087.4,2305.4 ; 2050.8,2372.9 2052.6,2372.9 ; 2051.1,2130.8 2054.4,2130.8 ; 2051.1,2305.7 2087.4,2305.7 ; 2051.1,2333.6 2073.3,2333.6 ; 2051.1,2373.2 2053.2,2373.2 ; 2051.4,2130.5 2054.4,2130.5 ; 2051.4,2141 2056.2,2141 ; 2051.4,2141.3 2056.2,2141.3 ; 2051.4,2373.5 2053.5,2373.5 ; 2051.7,2129.9 2054.4,2129.9 ; 2051.7,2130.2 2054.4,2130.2 ; 2051.7,2277.2 2067,2277.2 ; 2051.7,2306 2087.7,2306 ; 2051.7,2373.8 2053.8,2373.8 ; 2052,2129.6 2054.4,2129.6 ; 2052,2306.3 2087.7,2306.3 ; 2052,2333.3 2074.2,2333.3 ; 2052.3,2129.3 2054.4,2129.3 ; 2052.3,2140.7 2055,2140.7 ; 2052.3,2374.1 2054.1,2374.1 ; 2052.6,2129 2054.4,2129 ; 2052.6,2306.6 2088,2306.6 ; 2052.6,2333 2074.8,2333 ; 2052.6,2374.4 2054.4,2374.4 ; 2052.9,2140.1 2054.4,2140.1 ; 2052.9,2140.4 2054.7,2140.4 ; 2052.9,2277.5 2067.9,2277.5 ; 2052.9,2374.7 2055,2374.7 ; 2053.2,2132 2054.4,2132 ; 2053.2,2132.3 2054.4,2132.3 ; 2053.2,2132.6 2054.4,2132.6 ; 2053.2,2132.9 2054.4,2132.9 ; 2053.2,2133.2 2054.4,2133.2 ; 2053.2,2133.5 2054.4,2133.5 ; 2053.2,2133.8 2054.4,2133.8 ; 2053.2,2134.1 2054.4,2134.1 ; 2053.2,2134.4 2054.4,2134.4 ; 2053.2,2134.7 2054.4,2134.7 ; 2053.2,2135 2054.4,2135 ; 2053.2,2135.3 2054.4,2135.3 ; 2053.2,2135.6 2054.4,2135.6 ; 2053.2,2135.9 2054.4,2135.9 ; 2053.2,2136.2 2054.4,2136.2 ; 2053.2,2136.5 2054.4,2136.5 ; 2053.2,2136.8 2054.4,2136.8 ; 2053.2,2137.1 2054.4,2137.1 ; 2053.2,2137.4 2054.4,2137.4 ; 2053.2,2137.7 2054.4,2137.7 ; 2053.2,2138 2054.4,2138 ; 2053.2,2138.3 2054.4,2138.3 ; 2053.2,2138.6 2054.4,2138.6 ; 2053.2,2138.9 2054.4,2138.9 ; 2053.2,2139.2 2054.4,2139.2 ; 2053.2,2139.5 2054.4,2139.5 ; 2053.2,2139.8 2054.4,2139.8 ; 2053.2,2306.9 2088,2306.9 ; 2053.2,2332.7 2075.7,2332.7 ; 2053.2,2375 2055.3,2375 ; 2053.5,2307.2 2088.3,2307.2 ; 2053.5,2375.3 2055.6,2375.3 ; 2053.5,2471 2070.9,2471 ; 2053.8,2277.8 2068.5,2277.8 ; 2053.8,2332.4 2076.6,2332.4 ; 2053.8,2375.6 2055.9,2375.6 ; 2054.1,2307.5 2088.3,2307.5 ; 2054.1,2375.9 2056.5,2375.9 ; 2054.4,2307.8 2088.6,2307.8 ; 2054.4,2332.1 2077.2,2332.1 ; 2054.7,2278.1 2069.4,2278.1 ; 2054.7,2308.1 2088.6,2308.1 ; 2054.7,2331.8 2077.8,2331.8 ; 2054.7,2376.2 2056.8,2376.2 ; 2055,2376.5 2057.1,2376.5 ; 2055.3,2308.4 2088.9,2308.4 ; 2055.3,2331.5 2078.4,2331.5 ; 2055.3,2376.8 2057.4,2376.8 ; 2055.6,2172.5 2064,2172.5 ; 2055.6,2172.8 2064,2172.8 ; 2055.6,2173.1 2064,2173.1 ; 2055.6,2173.4 2064,2173.4 ; 2055.6,2173.7 2064,2173.7 ; 2055.6,2174 2064,2174 ; 2055.6,2174.3 2064,2174.3 ; 2055.6,2174.6 2064,2174.6 ; 2055.6,2174.9 2064,2174.9 ; 2055.6,2278.4 2070.3,2278.4 ; 2055.6,2308.7 2088.9,2308.7 ; 2055.6,2331.2 2079,2331.2 ; 2055.6,2377.1 2057.7,2377.1 ; 2055.9,2171.9 2063.7,2171.9 ; 2055.9,2172.2 2064,2172.2 ; 2055.9,2175.2 2064,2175.2 ; 2055.9,2175.5 2063.7,2175.5 ; 2055.9,2309 2089.2,2309 ; 2055.9,2377.4 2058.3,2377.4 ; 2056.2,2171.3 2063.4,2171.3 ; 2056.2,2171.6 2063.7,2171.6 ; 2056.2,2175.8 2063.7,2175.8 ; 2056.2,2176.1 2063.4,2176.1 ; 2056.2,2330.9 2079.6,2330.9 ; 2056.2,2377.7 2058.6,2377.7 ; 2056.5,2171 2063.1,2171 ; 2056.5,2176.4 2063.1,2176.4 ; 2056.5,2278.7 2070.9,2278.7 ; 2056.5,2309.3 2089.2,2309.3 ; 2056.5,2330.6 2080.2,2330.6 ; 2056.5,2378 2058.9,2378 ; 2056.8,2170.7 2063.1,2170.7 ; 2056.8,2176.7 2063.1,2176.7 ; 2056.8,2309.6 2089.2,2309.6 ; 2056.8,2330.3 2080.8,2330.3 ; 2056.8,2378.3 2059.2,2378.3 ; 2057.1,2170.4 2062.5,2170.4 ; 2057.1,2177 2062.8,2177 ; 2057.1,2309.9 2089.5,2309.9 ; 2057.4,2170.1 2062.2,2170.1 ; 2057.4,2177.3 2062.2,2177.3 ; 2057.4,2279 2071.8,2279 ; 2057.4,2310.2 2089.5,2310.2 ; 2057.4,2330 2081.4,2330 ; 2057.4,2378.6 2059.8,2378.6 ; 2057.7,2162 2066.1,2162 ; 2057.7,2162.3 2066.1,2162.3 ; 2057.7,2162.6 2066.1,2162.6 ; 2057.7,2162.9 2066.1,2162.9 ; 2057.7,2163.2 2066.1,2163.2 ; 2057.7,2163.5 2066.1,2163.5 ; 2057.7,2163.8 2066.1,2163.8 ; 2057.7,2164.1 2066.1,2164.1 ; 2057.7,2164.4 2066.1,2164.4 ; 2057.7,2164.7 2066.1,2164.7 ; 2057.7,2182.7 2066.1,2182.7 ; 2057.7,2183 2066.1,2183 ; 2057.7,2183.3 2066.1,2183.3 ; 2057.7,2183.6 2066.1,2183.6 ; 2057.7,2183.9 2066.1,2183.9 ; 2057.7,2184.2 2066.1,2184.2 ; 2057.7,2184.5 2066.1,2184.5 ; 2057.7,2184.8 2066.1,2184.8 ; 2057.7,2185.1 2066.1,2185.1 ; 2057.7,2185.4 2066.1,2185.4 ; 2057.7,2310.5 2089.5,2310.5 ; 2057.7,2329.7 2081.7,2329.7 ; 2057.7,2378.9 2060.1,2378.9 ; 2058,2161.4 2065.8,2161.4 ; 2058,2161.7 2065.8,2161.7 ; 2058,2165 2065.8,2165 ; 2058,2165.3 2065.8,2165.3 ; 2058,2169.8 2061.6,2169.8 ; 2058,2177.6 2061.9,2177.6 ; 2058,2182.1 2065.8,2182.1 ; 2058,2182.4 2065.8,2182.4 ; 2058,2185.7 2065.8,2185.7 ; 2058,2186 2065.8,2186 ; 2058,2329.4 2082.3,2329.4 ; 2058,2379.2 2060.4,2379.2 ; 2058.3,2160.8 2065.5,2160.8 ; 2058.3,2161.1 2065.5,2161.1 ; 2058.3,2165.6 2065.5,2165.6 ; 2058.3,2165.9 2065.5,2165.9 ; 2058.3,2181.5 2065.5,2181.5 ; 2058.3,2181.8 2065.5,2181.8 ; 2058.3,2186.3 2065.5,2186.3 ; 2058.3,2186.6 2065.5,2186.6 ; 2058.3,2279.3 2072.4,2279.3 ; 2058.3,2310.8 2089.8,2310.8 ; 2058.3,2329.1 2082.6,2329.1 ; 2058.3,2379.5 2060.7,2379.5 ; 2058.6,2160.5 2065.2,2160.5 ; 2058.6,2166.2 2065.2,2166.2 ; 2058.6,2181.2 2065.2,2181.2 ; 2058.6,2186.9 2065.2,2186.9 ; 2058.6,2311.1 2089.8,2311.1 ; 2058.6,2379.8 2061.3,2379.8 ; 2058.9,2160.2 2064.9,2160.2 ; 2058.9,2166.5 2064.9,2166.5 ; 2058.9,2169.5 2060.7,2169.5 ; 2058.9,2177.9 2061,2177.9 ; 2058.9,2180.9 2064.9,2180.9 ; 2058.9,2187.2 2064.9,2187.2 ; 2058.9,2311.4 2089.8,2311.4 ; 2058.9,2328.8 2083.2,2328.8 ; 2058.9,2380.1 2061.6,2380.1 ; 2058.9,2471.3 2065.8,2471.3 ; 2059.2,2166.8 2064.6,2166.8 ; 2059.2,2180.6 2064.6,2180.6 ; 2059.2,2187.5 2064.6,2187.5 ; 2059.2,2279.6 2073,2279.6 ; 2059.2,2311.7 2090.1,2311.7 ; 2059.2,2328.5 2083.5,2328.5 ; 2059.2,2380.4 2061.9,2380.4 ; 2059.5,2159.9 2064.6,2159.9 ; 2059.5,2312 2090.1,2312 ; 2059.5,2328.2 2084.1,2328.2 ; 2059.8,2159.6 2064,2159.6 ; 2059.8,2167.1 2064.3,2167.1 ; 2059.8,2180.3 2064,2180.3 ; 2059.8,2187.8 2064,2187.8 ; 2059.8,2279.9 2073.9,2279.9 ; 2059.8,2312.3 2090.1,2312.3 ; 2059.8,2327.9 2084.4,2327.9 ; 2059.8,2380.7 2062.2,2380.7 ; 2060.1,2312.6 2090.1,2312.6 ; 2060.1,2312.9 2090.4,2312.9 ; 2060.1,2327.6 2084.7,2327.6 ; 2060.1,2381 2062.5,2381 ; 2060.4,2159.3 2063.4,2159.3 ; 2060.4,2167.4 2063.4,2167.4 ; 2060.4,2180 2063.4,2180 ; 2060.4,2188.1 2063.4,2188.1 ; 2060.4,2313.2 2090.4,2313.2 ; 2060.4,2327.3 2085,2327.3 ; 2060.4,2381.3 2063.1,2381.3 ; 2060.7,2280.2 2074.5,2280.2 ; 2060.7,2313.5 2090.4,2313.5 ; 2060.7,2326.7 2085.9,2326.7 ; 2060.7,2327 2085.3,2327 ; 2060.7,2381.6 2063.4,2381.6 ; 2061,2313.8 2090.4,2313.8 ; 2061,2326.4 2086.2,2326.4 ; 2061,2381.9 2063.7,2381.9 ; 2061.3,2314.1 2090.4,2314.1 ; 2061.3,2314.4 2090.4,2314.4 ; 2061.3,2326.1 2086.5,2326.1 ; 2061.3,2382.2 2064,2382.2 ; 2061.6,2280.5 2075.1,2280.5 ; 2061.6,2314.7 2090.4,2314.7 ; 2061.6,2325.5 2086.8,2325.5 ; 2061.6,2325.8 2086.5,2325.8 ; 2061.6,2382.5 2064.6,2382.5 ; 2061.9,2315 2090.4,2315 ; 2061.9,2315.3 2090.7,2315.3 ; 2061.9,2325.2 2087.1,2325.2 ; 2061.9,2459.6 2109.9,2459.6 ; 2062.2,2280.8 2075.7,2280.8 ; 2062.2,2315.6 2090.7,2315.6 ; 2062.2,2315.9 2090.7,2315.9 ; 2062.2,2324.6 2087.7,2324.6 ; 2062.2,2324.9 2087.4,2324.9 ; 2062.2,2382.8 2064.9,2382.8 ; 2062.5,2316.2 2090.7,2316.2 ; 2062.5,2316.5 2090.7,2316.5 ; 2062.5,2324 2088,2324 ; 2062.5,2324.3 2088,2324.3 ; 2062.5,2383.1 2065.2,2383.1 ; 2062.8,2316.8 2090.7,2316.8 ; 2062.8,2317.1 2090.4,2317.1 ; 2062.8,2323.4 2088.6,2323.4 ; 2062.8,2323.7 2088.3,2323.7 ; 2062.8,2383.4 2065.5,2383.4 ; 2063.1,2281.1 2076.3,2281.1 ; 2063.1,2317.4 2090.4,2317.4 ; 2063.1,2317.7 2090.4,2317.7 ; 2063.1,2318 2090.4,2318 ; 2063.1,2318.3 2090.4,2318.3 ; 2063.1,2322.2 2089.2,2322.2 ; 2063.1,2322.5 2088.9,2322.5 ; 2063.1,2322.8 2088.9,2322.8 ; 2063.1,2323.1 2088.6,2323.1 ; 2063.1,2383.7 2065.8,2383.7 ; 2063.4,2318.6 2090.4,2318.6 ; 2063.4,2318.9 2090.4,2318.9 ; 2063.4,2319.2 2090.1,2319.2 ; 2063.4,2319.5 2090.1,2319.5 ; 2063.4,2319.8 2090.1,2319.8 ; 2063.4,2320.1 2090.1,2320.1 ; 2063.4,2320.4 2089.8,2320.4 ; 2063.4,2320.7 2089.8,2320.7 ; 2063.4,2321 2089.8,2321 ; 2063.4,2321.3 2089.5,2321.3 ; 2063.4,2321.6 2089.5,2321.6 ; 2063.4,2321.9 2089.2,2321.9 ; 2063.4,2384 2066.4,2384 ; 2063.7,2281.4 2077.2,2281.4 ; 2063.7,2384.3 2066.7,2384.3 ; 2064,2384.6 2067,2384.6 ; 2064.3,2281.7 2077.8,2281.7 ; 2064.6,2141 2070.6,2141 ; 2064.6,2141.3 2070.6,2141.3 ; 2064.6,2384.9 2067.3,2384.9 ; 2064.9,2385.2 2067.9,2385.2 ; 2065.2,2282 2078.4,2282 ; 2065.2,2385.5 2068.2,2385.5 ; 2065.2,2459.3 2110.5,2459.3 ; 2065.5,2385.8 2068.5,2385.8 ; 2065.8,2140.7 2069.7,2140.7 ; 2065.8,2154.5 2074.5,2154.5 ; 2065.8,2154.8 2074.5,2154.8 ; 2065.8,2155.1 2074.5,2155.1 ; 2065.8,2155.4 2074.5,2155.4 ; 2065.8,2155.7 2074.5,2155.7 ; 2065.8,2191.7 2074.5,2191.7 ; 2065.8,2192 2074.5,2192 ; 2065.8,2192.3 2074.5,2192.3 ; 2065.8,2192.6 2074.5,2192.6 ; 2065.8,2192.9 2074.5,2192.9 ; 2065.8,2282.3 2079,2282.3 ; 2065.8,2386.1 2068.8,2386.1 ; 2066.1,2140.4 2069.1,2140.4 ; 2066.1,2153.3 2074.2,2153.3 ; 2066.1,2153.6 2074.2,2153.6 ; 2066.1,2153.9 2074.2,2153.9 ; 2066.1,2154.2 2074.5,2154.2 ; 2066.1,2156 2074.5,2156 ; 2066.1,2156.3 2074.2,2156.3 ; 2066.1,2156.6 2074.2,2156.6 ; 2066.1,2156.9 2074.2,2156.9 ; 2066.1,2190.5 2074.2,2190.5 ; 2066.1,2190.8 2074.2,2190.8 ; 2066.1,2191.1 2074.2,2191.1 ; 2066.1,2191.4 2074.5,2191.4 ; 2066.1,2193.2 2074.5,2193.2 ; 2066.1,2193.5 2074.2,2193.5 ; 2066.1,2193.8 2074.2,2193.8 ; 2066.1,2194.1 2074.2,2194.1 ; 2066.1,2386.4 2069.4,2386.4 ; 2066.4,2129 2068.8,2129 ; 2066.4,2129.3 2068.8,2129.3 ; 2066.4,2129.6 2068.8,2129.6 ; 2066.4,2129.9 2068.8,2129.9 ; 2066.4,2130.2 2068.8,2130.2 ; 2066.4,2139.2 2068.8,2139.2 ; 2066.4,2139.5 2068.8,2139.5 ; 2066.4,2139.8 2068.8,2139.8